# Altium PCB Quadcopter_v2.PcbDoc
Units mm, origin at the board's own origin, x right, y up, seen from the top; angles counter-clockwise.
Board outline 120 x 90 mm, 2 copper layers (Top Layer, Bottom Layer); 14 components, 20 nets, 145 pads, 0 vias.
Unrouted connection lines stored in the file: 3.
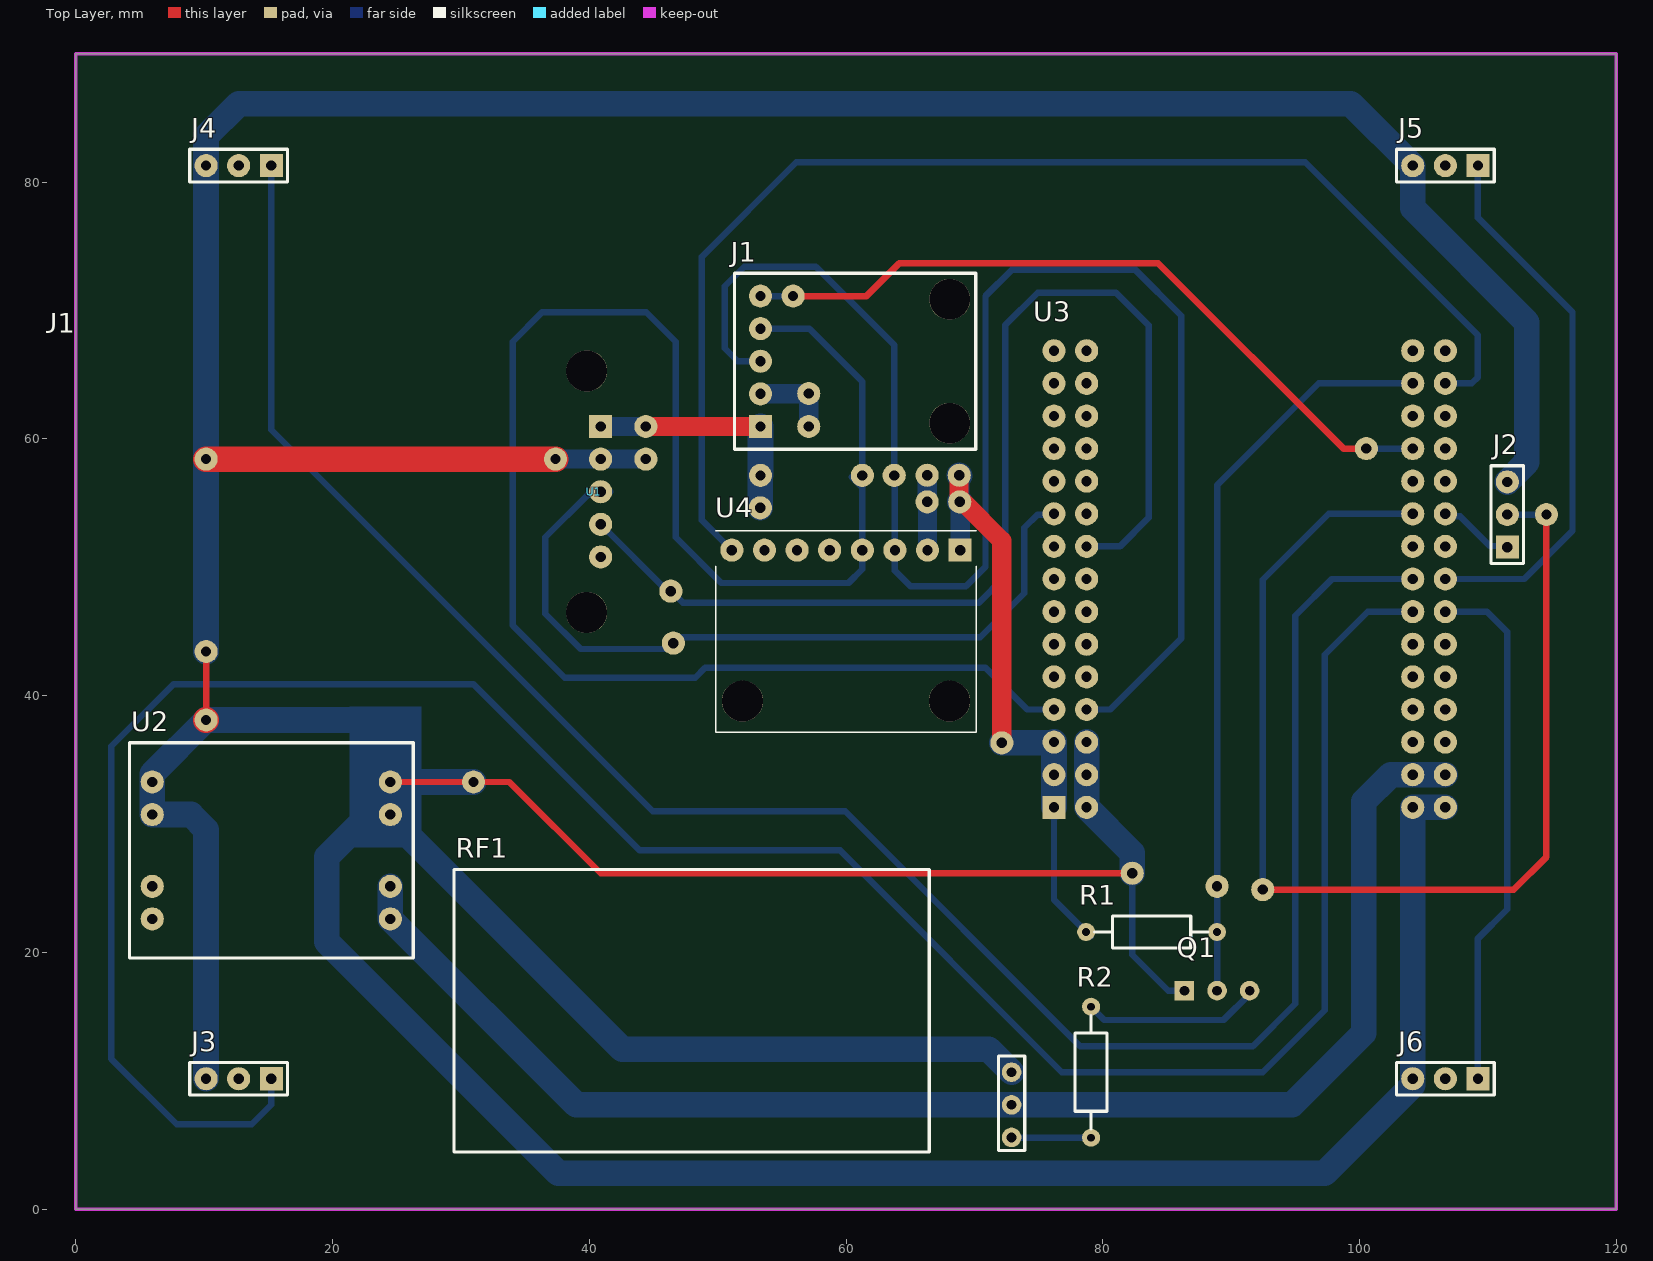
[diagram p0: Top Layer view]
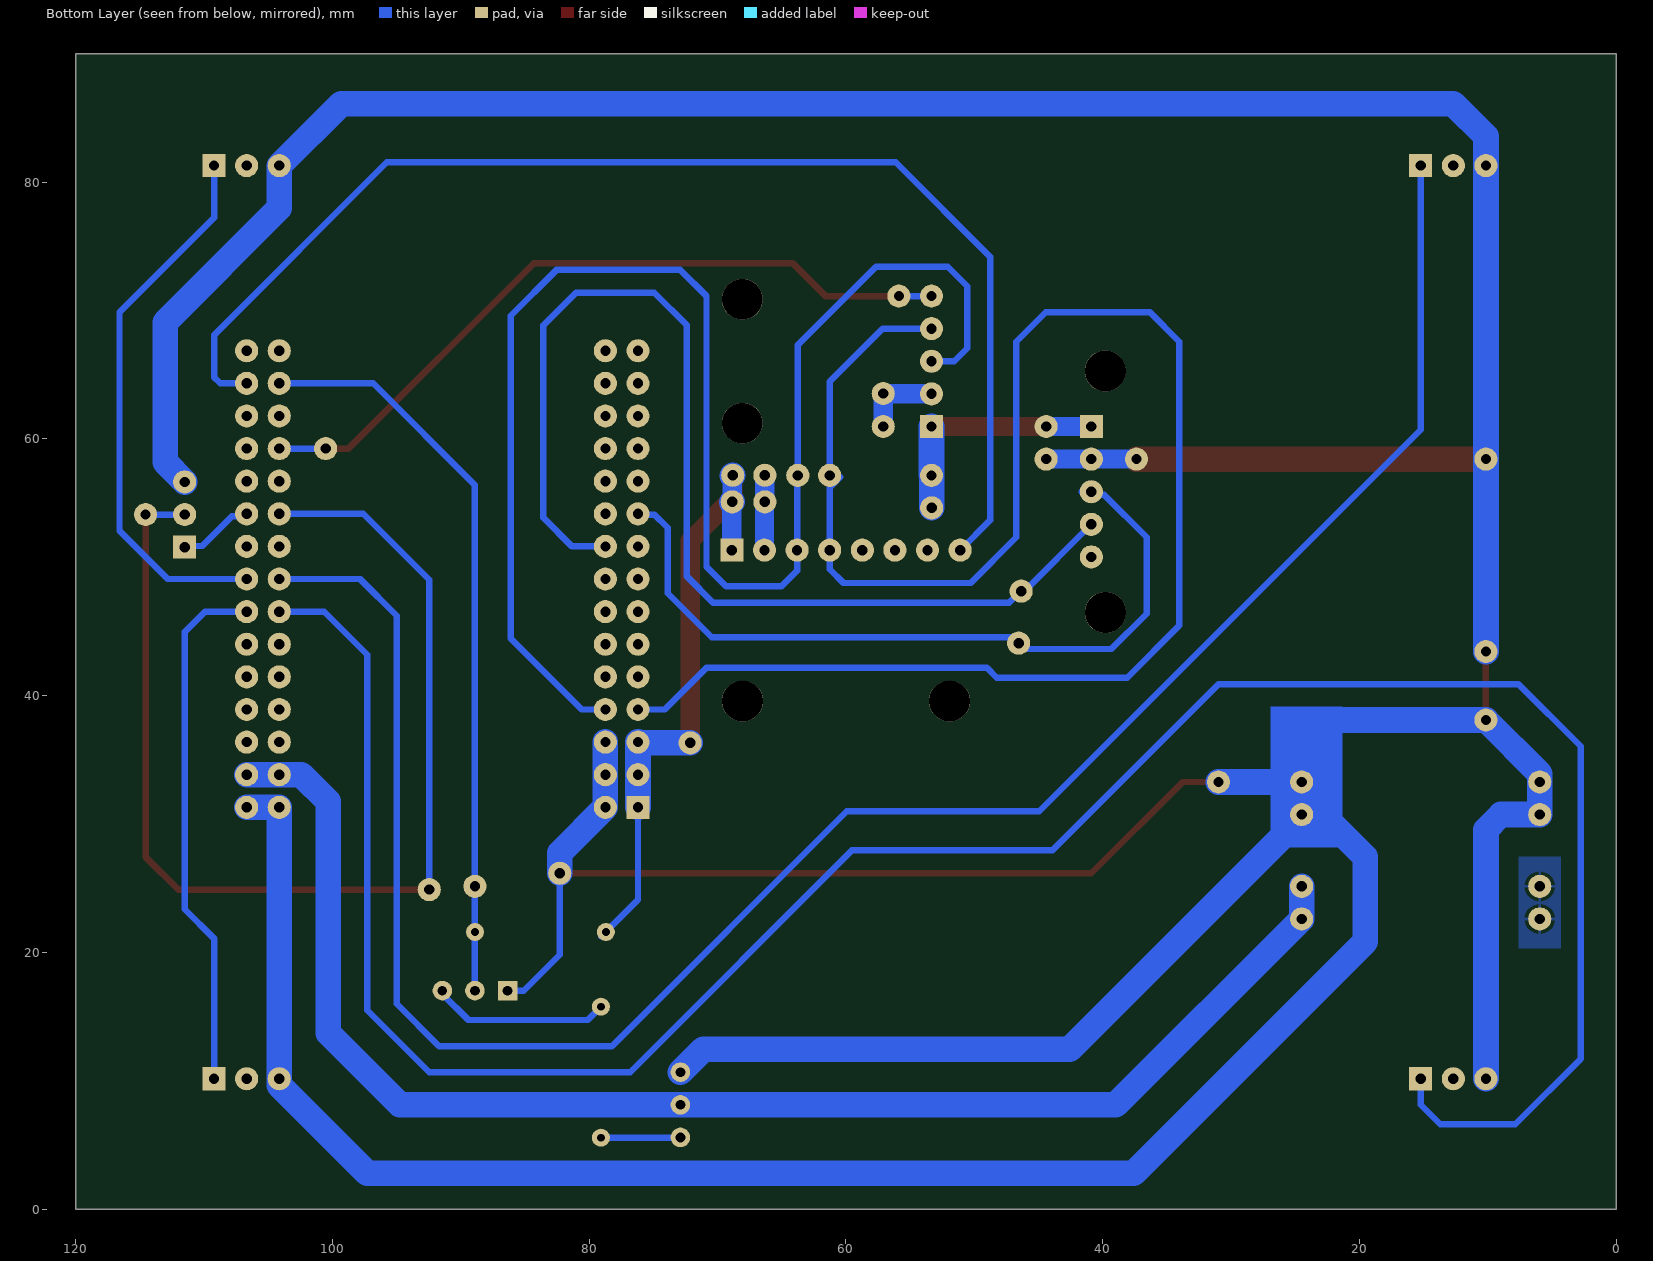
[diagram p1: Bottom Layer view, seen from below]

## Layer stack, top to bottom
Top Solder: solder mask 0.0102, Solder Resist, Dk 3.5
Top Layer: signal copper 0.0356
Dielectric 1: dielectric 0.32, FR-4, Dk 4.8
Bottom Layer: signal copper 0.0356
Bottom Solder: solder mask 0.0102, Solder Resist, Dk 3.5

## Board outline
0,0 0,90 120,90 120,0

## Design rules (kind name [scope] priority, off if disabled: settings)
Clearance [All] p1: gap=0.5 ignorepadtopadclearanceinfootprint=TRUE
PolygonConnect [All] p1: connectstyle=Relief reliefconductorwidth=0.254 reliefentries=4 polygonreliefangle="90 Angle" airgapwidth=0.254
RoutingVias [All] p1: holewidth=0.711 width=1.27 viastyle="Through Hole" minholewidth=0.711 minwidth=1.27 maxholewidth=0.711 maxwidth=1.27
SolderMaskExpansion [All] p1: expansion=0.102 istentingtop=FALSE
Width [All] p1: maxlimit=2 minlimit=0.5 preferedwidth=1
30 further rules are at their usual default settings.

## Components (designator, comment, footprint, x,y, rotation, side; value= is the part's Value field where it differs from the comment)
J1 "HMC5883L" HMC5883L 60.706,66.04 r180 top
J2 "Jump female 1x3" "FEMALE JUMP 1X3" 111.506,54.102 r90 top
J3 "Jump male 1x3" "FEMALE JUMP 1X3" 12.7,10.16 r180 top
J4 "Jump male 1x3" "FEMALE JUMP 1X3" 12.7,81.28 r180 top
J5 "Jump male 1x3" "FEMALE JUMP 1X3" 106.68,81.28 r180 top
J6 "Jump male 1x3" "FEMALE JUMP 1X3" 106.68,10.16 r180 top
Q1 "C1815" TO92127P508H508-3 88.9,17.018 r0 top value=C9014
R1 "10K" "Tro Vach 1/4W" 83.8,21.59 r180 top
R2 "1K" "Tro Vach 1/4W" 79.087,10.668 r90 top
RF1 "MC7RE" RECEIVER 47.976,15.458 r90 top
U1 "ZC323200" GPS_NEO 40.894,55.88 r90 top
U2 "Module MP1584 5V" MODULE_MP1584 15.24,27.94 r180 top
U3 "STM32F405_WEACTKIT" "STM32F405RGT6 - WEACT kit" 91.44,48.26 r90 top
U4 "OC09600" MODULE_MPU6050 60,45 r270 top

## Footprints (in the part's own frame and the unit in brackets; to place one, negate y for a bottom-side part, rotate by r counter-clockwise, add the part's x,y. Pads: shape width x height; smd on the part's side, far side on the other; paste and mask are expansions set on the pad)
"FEMALE JUMP 1X3" [mm]
  rect 1.8x1.8 hole 0.8: 1(-2.54,0)
  round 1.8 hole 0.8: 2(0,0) 3(2.54,0)
  silkscreen extent -3.81,-1.27 3.81,1.27
GPS_NEO [mm]
  round 1.8 hole 0.8: 1(-5.08,0) 2(-2.54,0) 3(0,0) 4(2.54,0)
  rect 1.8x1.8 hole 0.8: 5(5.08,0)
  round 3.2 hole 3.2 unplated mask+0: ""(-9.4,1.09) ""(9.4,1.09)
HMC5883L [mm]
  rect 1.8x1.8 hole 0.8: 1(7.366,5.08)
  round 1.8 hole 0.8: 2(7.366,2.54) 3(7.366,0) 4(7.366,-2.54) 5(7.366,-5.08)
  round 3.175 hole 3.175 unplated: ""(-7.366,-4.826) ""(-7.366,4.826)
  silkscreen extent -9.4,-6.86 9.4,6.86, body extent -1.5,-1.5 1.5,1.5, height 0.9
MODULE_MP1584 [mm]
  round 1.8 hole 0.8: 1(9.271,-5.334) 1(9.271,-2.794) 2(9.271,2.794) 2(9.271,5.334) 3(-9.271,2.794) 3(-9.271,5.334) 4(-9.271,-5.334) 4(-9.271,-2.794)
  silkscreen extent -11.05,-8.38 11.05,8.38
MODULE_MPU6050 [mm]
  round 1.8 hole 0.8 mask+0.102: AD0(-6.33,-6.35) GND(-6.33,6.35) INT(-6.33,-8.89) SCL(-6.33,3.81) SDA(-6.33,1.27) XCL(-6.33,-3.81) XDA(-6.33,-1.27)
  rect 1.8x1.8 hole 0.8 mask+0.102: VCC(-6.33,8.89)
  round 3.2 hole 3.2 unplated mask+0: ""(5.43,8.06) ""(5.43,-8.06)
  silkscreen extent -7.85,-10.15 7.85,10.15, body extent -7.85,-10.15 7.85,10.15, height 3
RECEIVER [mil]
  round 60 hole 30: 5V(-288.58,-981.18) GND(-188.58,-981.18) SBUS(-388.58,-981.18) SBUS(-388.58,-981.18)
  silkscreen extent -433,-1021 433,728
"STM32F405RGT6 - WEACT kit" [mm]
  rect 1.8x1.8 hole 0.8: 1(-16.96,15.24)
  round 1.8 hole 0.8: 2(-14.42,15.24) 3(-11.88,15.24) 4(-9.34,15.24) 5(-6.8,15.24) 6(-4.26,15.24) 7(-1.72,15.24) 8(0.82,15.24) 9(3.36,15.24) 10(5.9,15.24) 11(8.44,15.24) 12(10.98,15.24) 13(13.52,15.24) 14(16.06,15.24) 15(18.6,15.24) 16(-16.96,12.7) 16(-16.96,12.7) 17(-14.42,12.7) 18(-11.88,12.7) 19(-9.34,12.7) 20(-6.8,12.7) 21(-4.26,12.7) 22(-1.72,12.7) 23(0.82,12.7) 24(3.36,12.7) 25(5.9,12.7) 26(8.44,12.7) 27(10.98,12.7) 28(13.52,12.7) 29(16.06,12.7) 30(18.6,12.7) 31(-16.96,-12.7) 32(-14.42,-12.7) 33(-11.88,-12.7) 34(-9.34,-12.7) 35(-6.8,-12.7) 36(-4.26,-12.7) 37(-1.72,-12.7) 38(0.82,-12.7) 39(3.36,-12.7) 40(5.9,-12.7) 41(8.44,-12.7) 42(10.98,-12.7) 43(13.52,-12.7) 44(16.06,-12.7) 45(18.6,-12.7) 46(-16.96,-15.24) 47(-14.42,-15.24) 48(-11.88,-15.24) 49(-9.34,-15.24) 50(-6.8,-15.24) 51(-4.26,-15.24) 52(-1.72,-15.24) 53(0.82,-15.24) 54(3.36,-15.24) 55(5.9,-15.24) 56(8.44,-15.24) 57(10.98,-15.24) 58(13.52,-15.24) 59(16.06,-15.24) 60(18.6,-15.24)
TO92127P508H508-3 [mil]
  rect 60x60 hole 30: 1(-100,0)
  round 60 hole 30: 2(0,0) 3(100,0)
  body extent -92,-72 92,72, height 200
"Tro Vach 1/4W" [mm]
  round 1.4 hole 0.6: 1(-5.1,0) 2(5.1,0)
  silkscreen extent -4.39,-1.25 4.42,1.25, body extent -5.38,-1.2 5.38,1.2, height 2.41

## Part data
J1: "Magnetic Sensor Development Tools 3-Axis Digital Compass w 12-Bit ADC", Package=None, Check_prices=https://www.snapeda.com/parts/HMC5883L/STMicroelectronics/view-part/?ref=eda, MF=STMicroelectronics, MP=HMC5883L, SnapEDA_Link=https://www.snapeda.com/parts/HMC5883L/STMicroelectronics/view-part/?ref=snap
Q1: library part "Trans C1815 DIP", "NPN transistor"
R1 R2: library part RES
RF1: library part RECEIVER
U1: "GY-NEO6MV2 GY-GPS6MV2 NEO-6M GPS Module with Flight Control APM2.5", Package=None, Check_prices=https://www.snapeda.com/parts/ZC323200/YKS/view-part/?ref=eda, MF=YKS, MP=ZC323200, SnapEDA_Link=https://www.snapeda.com/parts/ZC323200/YKS/view-part/?ref=snap
U4: "GY-521 6 DOF MPU-6050 Module 3 Axis Accelerometer Gyroscope Module for Arduino", Package=None, Check_prices=https://www.snapeda.com/parts/OC09600/YKS/view-part/?ref=eda, MF=YKS, MP=OC09600, SnapEDA_Link=https://www.snapeda.com/parts/OC09600/YKS/view-part/?ref=snap

## Free pads (board coordinates)
  round 1.8 hole 0.8: 11(10.16,38.1) 11(10.16,43.434) 11(10.16,58.42) 11(30.988,33.274) 11(37.377,58.42) 11(44.411,58.42) 11(44.411,60.96) 11(46.355,48.133) 11(46.554,44.087) 11(53.326,54.624) 11(53.34,57.15) 11(55.88,71.12) 11(57.1,60.96) 11(57.1,63.528) 11(61.27,57.15) 11(63.754,57.15) 11(66.322,55.09) 11(66.322,57.164) 11(68.82,57.164) 11(68.862,55.09) 11(72.136,36.322) 11(82.296,26.162) 11(88.9,25.146) 11(92.456,24.892) 11(100.526,59.24) 11(114.554,54.102)

## Nets (pads, with @x,y where several pads share a name; then routed paths per layer and width w, separated by ;. In a path a pad name is that pad's centre, name@x,y a point inside that pad or via, vN(x,y) a via of type N, cw(c..) or ccw(c..) an arc to the next point about the centre after c; other vN are vias at no path point)
3V3: J1.1 pad.11@44.411,60.96 pad.11@53.34,57.15 pad.11@53.326,54.624 pad.11@68.82,57.164 pad.11@68.862,55.09 pad.11@72.136,36.322 R1.2 U1.5 U3.1 U3.2 U3.3 U4.VCC | length 67.4
  Top Layer w1.5: pad.11@44.411,60.96 J1.1 ; pad.11@68.805,57.164 68.805,55.147 68.862,55.09 68.919,55.033 69.173,55.033 72.136,52.07 pad.11@72.136,36.322
  Bottom Layer w0.5: U3.1 76.2,24.09 R1.2@79.053,21.237
  Bottom Layer w1.5: U1.5 pad.11@44.411,60.96 ; pad.11@68.862,55.09 pad.11@68.862,57.122 ; U4.VCC pad.11@68.89,55.062
  Bottom Layer w2: pad.11@53.326,54.624 53.326,57.136 53.34,57.15 J1.1 ; pad.11@68.82,57.164 pad.11@68.862,57.122 ; pad.11@68.862,55.09 pad.11@68.89,55.062 ; pad.11@72.136,36.322 76.142,36.322 U3.3 U3.2 U3.1
5V: RF1.5V U2.3 U3.32 U3.47 | length 111.9
  Bottom Layer w2: U2.3@24.511,25.146 24.511,22.606 38.989,8.128 94.742,8.128 100.33,13.716 100.33,31.75 102.42,33.84 U3.32 U3.47
ESC1_PWM: J3.1 U3.37 | length 188.6
  Bottom Layer w0.5: J3.1 15.24,8.128 13.716,6.604 7.874,6.604 2.775,11.703 2.775,36.049 7.62,40.894 30.988,40.894 43.942,27.94 59.542,27.94 76.814,10.668 92.456,10.668 97.282,15.494 97.282,43.18 100.642,46.54 U3.37
ESC2_PWM: J4.1 U3.38 | length 162.1
  Bottom Layer w0.5: J4.1 15.24,60.706 44.958,30.988 59.944,30.988 78.232,12.7 91.694,12.7 94.996,16.002 94.996,46.228 97.848,49.08 U3.38
ESC3_PWM: J5.1 U3.53 | length 43
  Bottom Layer w0.5: U3.53 112.834,49.08 116.586,52.832 116.586,69.85 109.22,77.216 J5.1
ESC4_PWM: J6.1 U3.52 | length 41.2
  Bottom Layer w0.5: U3.52 109.924,46.54 111.506,44.958 111.506,23.368 109.22,21.082 J6.1
GND: J1.2 J2.3 J3.3 J4.3 J5.3 J6.3 pad.11@10.16,38.1 pad.11@10.16,43.434 pad.11@10.16,58.42 pad.11@30.988,33.274 pad.11@37.377,58.42 pad.11@44.411,58.42 pad.11@57.1,60.96 pad.11@57.1,63.528 pad.11@66.322,55.09 pad.11@66.322,57.164 pad.11@82.296,26.162 Q1.1 RF1.GND U1.4 U2.1 U2.4 U3.16 U3.17 U3.18 U3.31 U3.46 U4.GND | length 550.9
  Top Layer w0.5: pad.11@10.16,38.1 pad.11@10.16,43.434 ; U2.4@24.511,33.274 30.988,33.274 33.782,33.274 40.894,26.162 pad.11@82.296,26.162
  Top Layer w2: pad.11@10.16,58.42 pad.11@37.377,58.42
  Bottom Layer w0.5: pad.11@66.294,55.118 66.322,55.09 pad.11@66.35,55.062 ; pad.11@82.296,26.162 82.296,19.812 85.09,17.018 Q1.1
  Bottom Layer w1.5: pad.11@37.377,58.42 U1.4 pad.11@44.411,58.42 ; J1.2 pad.11@57.072,63.5 ; pad.11@57.1,60.96 pad.11@57.1,63.528 ; pad.11@66.322,55.062 66.322,55.09 pad.11@66.322,56.896 ; U4.GND pad.11@66.35,55.062
  Bottom Layer w2: J3.3 10.16,29.562 8.988,30.734 5.969,30.734 5.969,33.274 5.969,33.909 10.16,38.1 23.339,38.1 24.511,36.928 U2.4@24.511,33.274 ; pad.11@10.16,43.434 10.16,58.42 J4.3 10.16,83.566 12.7,86.106 99.314,86.106 J5.3 104.14,77.978 113.03,69.088 113.03,58.166 J2.3 ; U2.4@24.511,30.519 42.584,12.446 71.12,12.446 RF1.GND ; pad.11@30.988,33.274 U2.4@24.511,33.274 ; U3.18 U3.17 78.74,31.3 82.296,27.744 pad.11@82.296,26.162 ; U3.46 U3.31 J6.3 104.14,9.652 97.282,2.794 37.592,2.794 19.558,20.828 19.558,27.432 22.86,30.734 24.511,30.734 U2.4@24.511,33.274
HMC5883L_INT: J1.5 pad.11@55.88,71.12 pad.11@100.526,59.24 U3.42 | length 57.8
  Top Layer w0.5: pad.11@55.88,71.12 61.594,71.12 64.134,73.66 84.328,73.66 98.748,59.24 pad.11@100.526,59.24
  Bottom Layer w0.5: J1.5 pad.11@55.88,71.12 ; pad.11@100.526,59.24 U3.42
I2C2_SCL: J1.3 pad.11@63.754,57.15 U3.19 U4.SCL | length 123.6
  Bottom Layer w0.5: J1.3 51.562,66.04 50.546,67.056 50.546,71.882 52.07,73.406 57.658,73.406 63.754,67.31 63.754,58.093 63.759,58.088 63.759,57.399 pad.11@63.754,57.15 ; pad.11@63.81,57.15 U4.SCL 63.81,49.728 65.024,48.514 69.342,48.514 70.866,50.038 70.866,71.12 72.898,73.152 82.55,73.152 86.106,69.596 86.106,44.45 80.576,38.92 U3.19
I2C2_SDA: J1.4 pad.11@61.27,57.15 U3.4 U4.SDA | length 139.2
  Bottom Layer w0.5: J1.4 57.15,68.58 61.27,64.46 61.27,57.15 60.452,57.025 60.799,56.679 61.27,56.207 61.27,49.84 60.198,48.768 50.292,48.768 46.736,52.324 46.736,67.564 44.45,69.85 36.322,69.85 34.036,67.564 34.036,45.466 38.1,41.402 48.26,41.402 49.022,42.164 70.866,42.164 74.11,38.92 U3.4
MPU6050_INT: U3.59 U4.INT | length 98.9
  Bottom Layer w0.5: U4.INT 48.768,53.672 48.768,74.168 56.134,81.534 95.758,81.534 109.22,68.072 109.22,64.8 108.743,64.323 106.683,64.323 U3.59
NetQ1_3: Q1.3 R2.2 | length 13.9
  Bottom Layer w0.5: R2.2 80.123,14.732 89.408,14.732 91.44,16.764 Q1.3
NetR2_1: R2.1 RF1.SBUS | length 6.2
  Bottom Layer w0.5: RF1.SBUS@72.918,5.568 R2.1
UART1_RX: pad.11@88.9,25.146 Q1.2 R1.1 U3.44 | length 57.9
  Bottom Layer w0.5: Q1.2 R1.1 88.9,25.146 88.9,56.388 96.832,64.32 U3.44
UART1_TX: U3.58
UART2_RX: pad.11@46.355,48.133 U1.2 U3.24 | length 88.4
  Bottom Layer w0.5: U1.2 46.101,48.133 46.409,48.133 47.298,47.244 70.358,47.244 72.39,49.276 72.39,68.834 74.93,71.374 81.026,71.374 83.566,68.834 83.566,53.848 81.338,51.62 U3.24
UART2_TX: pad.11@46.554,44.087 U1.3 U3.10 | length 60.9
  Bottom Layer w0.5: U1.3@40.72,55.499 41.275,55.499 U1.3@41.656,55.88 ; U1.3 40.645,55.631 39.883,55.631 36.576,52.324 36.576,46.385 39.331,43.63 46.097,43.63 47.011,44.544 70.452,44.544 73.89,47.982 73.89,53.062 74.927,54.099 76.139,54.099 U3.10
UART3_RX: J2.1 U3.55 | length 5.9
  Bottom Layer w0.5: U3.55 106.868,53.972 107.826,53.972 110.149,51.649 111.419,51.649 J2.1
UART3_TX: J2.2 pad.11@92.456,24.892 pad.11@114.554,54.102 U3.40 | length 90.8
  Top Layer w0.5: pad.11@92.456,24.892 112.014,24.892 114.554,27.432 pad.11@114.554,54.102
  Bottom Layer w0.5: pad.11@92.456,24.892 92.456,49.022 97.594,54.16 U3.40 ; J2.2 pad.11@114.554,54.102
VBAT: U2.2
pads on no net: J1. J3.2 J4.2 J5.2 J6.2 U1. U1.1 U3.5 U3.6 U3.7 U3.8 U3.9 U3.11 U3.12 U3.13 U3.14 U3.15 U3.20 U3.21 U3.22 U3.23 U3.25 U3.26 U3.27 U3.28 U3.29 U3.30 U3.33 U3.34 U3.35 U3.36 U3.39 U3.41 U3.43 U3.45 U3.48 U3.49 U3.50 U3.51 U3.54 U3.56 U3.57 U3.60 U4. U4.AD0 U4.XCL U4.XDA

## Polygon pours and split planes (outlines as drawn)
VBAT on Bottom Layer "VBAT_L02_P001" (solid, pour order 1): 4.318,27.432 7.62,27.432 7.62,20.32 4.318,20.32

## Keep-outs
Top Layer:
  lines w0.254: 1.27,0 0,0 ; 0,0 120,0 120,90 0,90 0,0

## Other copper
Bottom Layer:
  region net GND: 21.336,39.116 26.924,39.116 26.924,28.194 21.336,28.194

## Text inside footprints (layer, text, board x,y; h text height)
J1: Mechanical 13 "DRDY" at 54.728,71.124 h1.02 r180; Mechanical 13 "SDA" at 54.729,68.58 h1.02 r180; Mechanical 13 "SCL" at 54.728,66.037 h1.02 r180; Mechanical 13 "GND" at 54.729,63.493 h1.02 r180; Mechanical 13 "X" at 61.452,68.339 h0.81 r180; Mechanical 13 "Y" at 64.052,70.938 h0.81 r180; Mechanical 13 "Z" at 60.852,71.546 h0.81 r180; Mechanical 13 "Magnetometer" at 68.891,65.849 h0.81 r180; Mechanical 13 "VCC" at 54.728,60.949 h1.02 r180